# Altium PCB PCB1.PcbDoc
Units mil, origin at the board's own origin, x right, y up, seen from the top; angles counter-clockwise.
Board outline 6000 x 4000 mil, 2 copper layers (Top Layer, Bottom Layer); 64 components, 53 nets, 188 pads, 0 vias.
Unrouted connection lines stored in the file: 117.
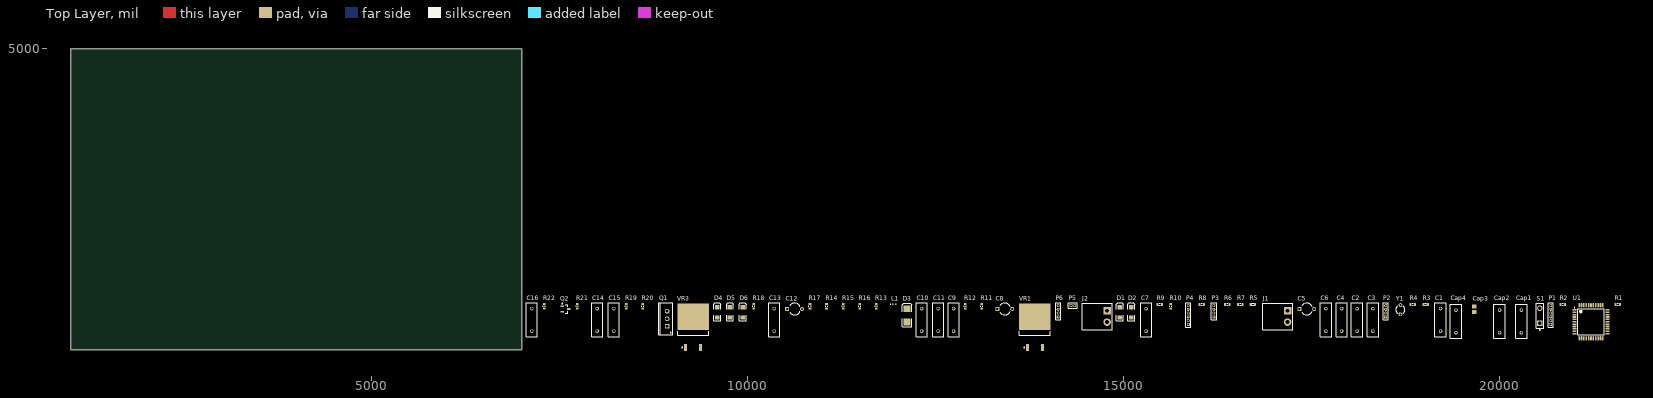
[diagram p0: Top Layer view]
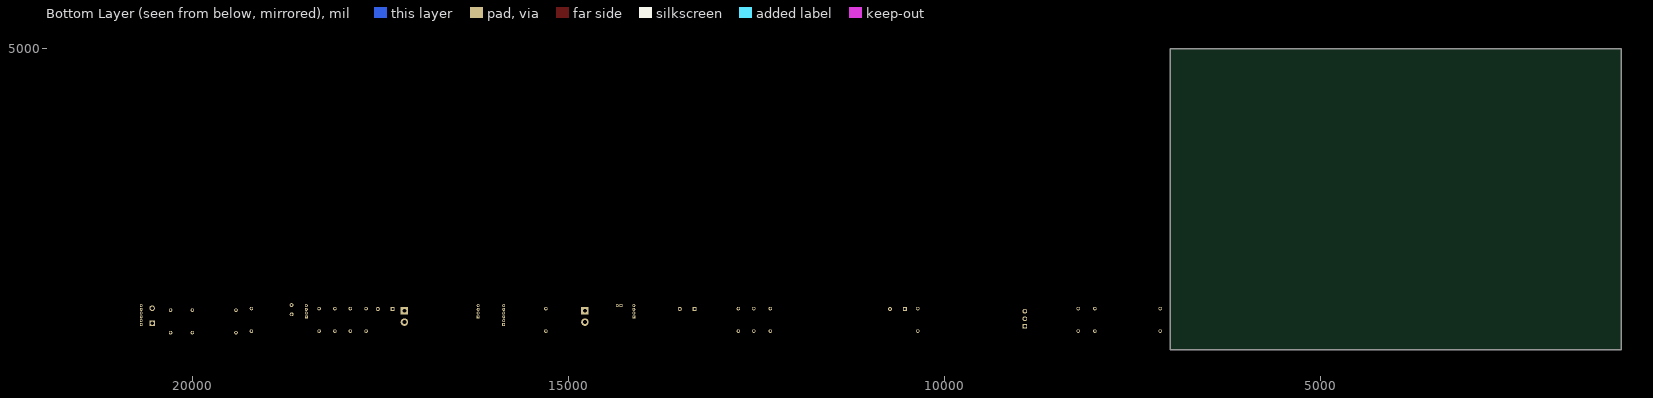
[diagram p1: Bottom Layer view, seen from below]

## Layer stack, top to bottom
Top Layer: signal copper 1.4
Dielectric: dielectric 12.6, FR-4, Dk 4.8
Bottom Layer: signal copper 1.4

## Board outline
1000,1000 7000,1000 7000,5000 1000,5000

## Design rules (kind name [scope] priority, off if disabled: settings)
Clearance [All] p1: gap=10
PolygonConnect [All] p1: connectstyle=Relief reliefconductorwidth=10 reliefentries=4 polygonreliefangle="90 Angle"
RoutingVias [All] p1: holewidth=28 width=50 viastyle="Through Hole" minholewidth=28 minwidth=50 maxholewidth=28 maxwidth=50
SilkscreenOverComponentPads [All] p1: minsilkscreentomaskgap=10
SolderMaskExpansion [All] p1: expansion=4
Width [All] p1: maxlimit=10 minlimit=10 preferedwidth=10
27 further rules are at their usual default settings.

## Components (designator, comment, footprint, x,y, rotation, side; value= is the part's Value field where it differs from the comment)
C1 "Cap" RAD-0.3 19215,1395 r90 top
C2 "Cap" RAD-0.3 18105,1395 r90 top
C3 "Cap" RAD-0.3 18315,1395 r90 top
C4 "Cap" RAD-0.3 17900,1395 r90 top
C5 "Cap2" CAPR5-4X5 17435,1540 r0 top
C6 "Cap" RAD-0.3 17690,1395 r90 top
C7 "Cap" RAD-0.3 15300,1395 r90 top
C8 "Cap2" CAPR5-4X5 13420,1540 r0 top
C9 "Cap" RAD-0.3 12740,1395 r90 top
C10 "Cap" RAD-0.3 12315,1395 r90 top
C11 "Cap" RAD-0.3 12535,1395 r90 top
C12 "Cap2" CAPR5-4X5 10625,1540 r0 top
C13 "Cap" RAD-0.3 10355,1395 r90 top
C14 "Cap" RAD-0.3 8000,1395 r90 top
C15 "Cap" RAD-0.3 8220,1395 r90 top
C16 "Cap" RAD-0.3 7130,1395 r90 top
Cap1 "0.1uF" RAD-0.3 20290,1375 r90 top
Cap2 "0.1uF" RAD-0.3 20000,1375 r90 top
Cap3 "0.1uF" 0805 19665,1535 r90 top
Cap4 "0.1uF" RAD-0.3 19420,1375 r90 top
D1 "LED2" DSO-F2/D6.1 14950,1495 r90 top
D2 "LED2" DSO-F2/D6.1 15100,1495 r90 top
D3 "D Schottky" DSO-C2/X2.3 12120,1455 r90 top
D4 "LED2" DSO-F2/D6.1 9595,1495 r90 top
D5 "LED2" DSO-F2/D6.1 9765,1495 r90 top
D6 "LED2" DSO-F2/D6.1 9935,1495 r90 top
J1 "MINICONNEC_2B" MINICONNEC_C 16845,1615 r0 top
J2 "MINICONNEC_2B" MINICONNEC_C 14445,1615 r0 top
L1 "Inductor" INDC1005AL 11950,1605 r0 top
P1 "MHDR1X6" MHDR1X6 20680,1335 r90 top
P2 "MHDR1X4" MHDR1X4 18485,1435 r90 top
P3 "MHDR1X4" MHDR1X4 16200,1435 r90 top
P4 "MHDR1X6" MHDR1X6 15860,1335 r90 top
P5 "MHDR1X2" MHDR1X2 14300,1585 r0 top
P6 "MHDR1X4" MHDR1X4 14130,1435 r90 top
Q1 "PMOS-2" SFM-T3/A4.7V 8930,1410 r90 top
Q2 "QNPN" SOT95P240-3N 7580,1540 r0 top
R1 "Res3" RESC1608L 21570,1600 r0 top
R2 "Res3" RESC1608L 20840,1600 r0 top
R3 "Res3" RESC1608L 19015,1600 r0 top
R4 "Res3" RESC1608L 18845,1600 r0 top
R5 "Res3" RESC1608L 16720,1600 r0 top
R6 "Res3" RESC1608L 16380,1600 r0 top
R7 "Res3" RESC1608L 16550,1600 r0 top
R8 "Res3" RESC1608L 16040,1600 r0 top
R9 "330" RESC1608L 15480,1600 r0 top
R10 "Res3" RESC1608L 15625,1575 r90 top
R11 "Res3" RESC1608L 13115,1575 r90 top
R12 "Res3" RESC1608L 12895,1575 r90 top
R13 "Res3" RESC1608L 11710,1575 r90 top
R14 "Res3" RESC1608L 11050,1575 r90 top
R15 "Res3" RESC1608L 11270,1575 r90 top
R16 "Res3" RESC1608L 11490,1575 r90 top
R17 "Res3" RESC1608L 10830,1575 r90 top
R18 "Res3" RESC1608L 10080,1575 r90 top
R19 "Res3" RESC1608L 8385,1575 r90 top
R20 "Res3" RESC1608L 8605,1575 r90 top
R21 "Res3" RESC1608L 7735,1575 r90 top
R22 "Res3" RESC1608L 7295,1575 r90 top
S1 "SW-PB" SPST-2 20535,1450 r90 top
U1 "PIC18F4431-E/PT" TQFP-PT44_L 21215,1370 r0 top
VR1 "LM1117T-3.3" TO254P1510-3_4N 13820,1295 r90 top
VR3 "LM1117T-5.0" TO254P1510-3_4N 9275,1295 r90 top
Y1 "XTAL 4MHz" BCY-W2/D3.1 18680,1530 r0 top

## Footprints (in the part's own frame and the unit in brackets; to place one, negate y for a bottom-side part, rotate by r counter-clockwise, add the part's x,y. Pads: shape width x height; smd on the part's side, far side on the other; paste and mask are expansions set on the pad)
0805 [mm] "Chip Resistor; Body 2.0 x 1.3 mm (LxW typ)"
  rect 1.3x1.5 smd: 1(-0.95,0) 2(0.95,0)
BCY-W2/D3.1 [mm] "Crystal, Thru-Hole; 2 Leads; Body 3.1 x 8.2 mm (Dia.xH)"
  round 1.3 hole 0.7: 1(0,1.55) 2(0,-1.55)
  silkscreen extent -1.55,-1.19 1.55,1.17
CAPR5-4X5 [mm] "Capacitor; 2 Leads"
  rect 1.35x1.35 hole 0.8: 1(-2.5,0)
  round 1.35 hole 0.8: 2(2.5,0)
  silkscreen extent -1.69,-2 1.82,2
DSO-C2/X2.3 [mm] "DO-214-AA/SMB; 2 C-Bend Leads; Body 5.3 x 3.6 mm, inc. leads (LxW)"
  rect 2.3x2.3 smd: 1(-2.25,0) 2(2.25,0)
  silkscreen extent -3.8,-1.55 4.1,1.55
DSO-F2/D6.1 [mm] "SMT LED; 2 Flat Leads"
  rect 1.5x1.5 smd: 1(-1.75,0) 2(1.75,0)
  silkscreen extent -2.9,-1.15 3.2,1.15
INDC1005AL [mm] "Chip Inductor, Body 1.0x0.5mm, IPC High Density"
  rect 0.6x0.5 smd: 1(-0.5,0) 2(0.5,0)
  silkscreen extent -1.1,-0.15 -1.1,0.15, body extent -0.55,-0.3 0.55,0.3, height 0.55
MHDR1X2 [mm] "Connector; Header; 2 Position"
  rect 1x1 hole 0.6: 1(0,0)
  round 1 hole 0.6: 2(1.27,0)
  silkscreen extent -0.9,-0.9 2.17,0.9
MHDR1X4 [mm] "Connector; Header; 4 Position"
  rect 1x1 hole 0.6: 1(0,0)
  round 1 hole 0.6: 2(1.27,0) 3(2.54,0) 4(3.81,0)
  silkscreen extent -0.9,-0.9 4.71,0.9
MHDR1X6 [mm] "Connector; Header; 6 Position"
  rect 1x1 hole 0.6: 1(0,0)
  round 1 hole 0.6: 2(1.27,0) 3(2.54,0) 4(3.81,0) 5(5.08,0) 6(6.35,0)
  silkscreen extent -0.9,-0.9 7.25,0.9
MINICONNEC_C [mil]
  rect 100x100 hole 50: 1(335,-100)
  round 100 hole 50: 2(335,-250)
  silkscreen extent 2,-350 405,2
RAD-0.3 [mm] "Radial Cap, Thru-Hole; 2 Leads; 0.3 in Pin Spacing"
  round 1.2 hole 0.7: 1(-3.81,0) 2(3.81,0)
  silkscreen extent -5.71,-1.91 5.71,1.91
RESC1608L [mm] "Chip Resistor, Body 1.6x0.8mm, IPC High Density"
  rect 0.7x0.9 smd: 1(-0.75,0) 2(0.75,0)
  silkscreen extent -0.2,-0.35 0.2,0.35, body extent -0.85,-0.48 0.85,0.48, height 0.9
SFM-T3/A4.7V [mm] "TO, Thru-Hole, Vertical, Heatsink Mounted; 3 In-Line Leads; Pitch 2.54 mm"
  rect 1.6x1.6 hole 1: 1(-2.54,0)
  round 1.6 hole 1: 2(0,0) 3(2.54,0)
  silkscreen extent -5.35,-1.85 5.35,2.85, body extent -5.4,-1.9 5.4,2.9, height 19.3
SOT95P240-3N [mm] "SOT23, 3-Leads, Body 2.9x1.3mm, Pitch 0.95mm, Lead Span 2.4mm, IPC Medium Density"
  rect 1.15x0.6 smd: 1(-1.125,0.95) 2(-1.125,-0.95) 3(1.125,0)
  silkscreen extent -1.25,-1.5 0.7,1.92, body extent -0.7,-1.5 0.7,1.5, height 1.14
SPST-2 [mm] "Circuit Breaker; 2 Leads"
  rect 1.85x1.85 hole 1.1: 1(-2.54,0)
  round 1.85 hole 1.1: 2(2.54,0)
  silkscreen extent -4.89,-1.27 4.28,1.27
TO254P1510-3_4N [mm] "D2-PAK, 4-Leads, Body 8.8x10.4mm, Pitch 2.54mm, Lead Span 15.1mm, IPC Medium Density"
  rect 2.4x1.05 smd: 1(-6.8,2.54) 3(-6.8,-2.54)
  rect 8.9x10.65 smd: 2(3.55,0)
  silkscreen extent -6.92,-5.25 -1.3,5.25, body extent -2.7,-5.28 6.3,5.28, height 4.69
TQFP-PT44_L [mm] "Thin QFP, 44-Leads, Body 10x10mm, Pitch 0.8mm, IPC High Density"
  oval 1.45x0.55 smd: 1(-5.6,4) 2(-5.6,3.2) 3(-5.6,2.4) 4(-5.6,1.6) 5(-5.6,0.8) 6(-5.6,0) 7(-5.6,-0.8) 8(-5.6,-1.6) 9(-5.6,-2.4) 10(-5.6,-3.2) 11(-5.6,-4) 23(5.6,-4) 24(5.6,-3.2) 25(5.6,-2.4) 26(5.6,-1.6) 27(5.6,-0.8) 28(5.6,0) 29(5.6,0.8) 30(5.6,1.6) 31(5.6,2.4) 32(5.6,3.2) 33(5.6,4)
  oval 0.55x1.45 smd: 12(-4,-5.6) 13(-3.2,-5.6) 14(-2.4,-5.6) 15(-1.6,-5.6) 16(-0.8,-5.6) 17(0,-5.6) 18(0.8,-5.6) 19(1.6,-5.6) 20(2.4,-5.6) 21(3.2,-5.6) 22(4,-5.6) 34(4,5.6) 35(3.2,5.6) 36(2.4,5.6) 37(1.6,5.6) 38(0.8,5.6) 39(0,5.6) 40(-0.8,5.6) 41(-1.6,5.6) 42(-2.4,5.6) 43(-3.2,5.6) 44(-4,5.6)
  silkscreen extent -5.72,-4.45 4.45,4.95, body extent -5,-5 5,5, height 1.2

## Part data
C1 C2 C3 C4 C5 C6 C7 C8 C9 C10 C11 C12 C13 C14 C15 C16: "Capacitor"
Cap1 Cap2 Cap3 Cap4: library part Cap, "Capacitor"
D1 D2 D4 D5 D6: "Typical RED, GREEN, YELLOW, AMBER GaAs LED"
D3: "Schottky Diode"
J1 J2: "Connecteur"
P1 P4: "Header, 6-Pin"
P2 P3 P6: "Header, 4-Pin"
P5: "Header, 2-Pin"
Q1: "P-Channel Power MOSFET"
Q2: "NPN Bipolar Transistor"
R1 R2 R3 R4 R5 R6 R7 R8 R10 R11 R12 R13 R14 R15 R16 R17 R18 R19 R20 R21 R22: "Resistor"
R9: library part Res3, "Resistor"
S1: "Switch"
U1: library part PIC18F4431-I/PT, "Enhanced Flash Microcontroller with nanoWatt Technology, High Performance PWM and A/D, 16K Flash, 44-Pin TQFP, Industrial Temperature"
VR1 VR3: library part "Volt Reg", "Voltage Regulator"
Y1: library part XTAL, "Crystal Oscillator"

## Nets (pads, with @x,y where several pads share a name; then routed paths per layer and width w, separated by ;. In a path a pad name is that pad's centre, name@x,y a point inside that pad or via, vN(x,y) a via of type N, cw(c..) or ccw(c..) an arc to the next point about the centre after c; other vN are vias at no path point)
"3,3 V": U1.7 U1.28
"3.3 V": R1.2
3.3V: C7.2 C11.2 Cap1.1 Cap2.2 P1.2 P3.1 P4.4 R6.2 R7.2 R14.2 VR1.3
5V: C15.2 Cap4.2 P2.1 R15.2 VR3.3
12V: C5.1 C6.2 C10.2 C12.1 C13.2 C14.2 J2.2 Q1.3 R12.2 R16.2 R18.2 VR1.1 VR3.1
GND: C1.1 C4.1 C5.2 C6.1 C7.1 C8.2 C9.1 C10.1 C11.1 C12.2 C13.1 C14.1 C15.1 C16.1 Cap1.2 Cap2.1 Cap3.1 Cap4.1 D1.2 D2.2 D4.2 D5.2 D6.2 J2.1 P1.3 P2.2 P3.2 P4.5 P4.6 P5.1 P6.1 P6.3 Q2.3 R4.2 R8.2 R13.2 R20.1 R22.1 S1.1 U1.6 U1.29 VR1.2 VR3.2
NetC1_2: C1.2 U1.31 Y1.2
NetC2_1: C2.1 J1.1
NetC2_2: C2.2
NetC3_1: C3.1
NetC3_2: C3.2 J1.2
NetC4_2: C4.2 U1.30 Y1.1
NetC8_1: C8.1 C9.2 L1.1 P5.2
NetC16_2: C16.2 R19.1
NetCap3_2: Cap3.2 R1.1 R2.1 S1.2
NetD1_1: D1.1 R9.2
NetD2_1: D2.1 R10.2
NetD3_1: D3.1 L1.2
NetD3_2: D3.2 R12.1 R17.2
NetD4_1: D4.1 R14.1
NetD5_1: D5.1 R15.1
NetD6_1: D6.1 R16.1
NetP1_1: P1.1 R2.2 U1.18
NetP1_4: P1.4 U1.17
NetP1_5: P1.5 U1.16
NetP2_3: P2.3 R3.2
NetP2_4: P2.4 R5.2
NetP3_3: P3.3 R6.1 U1.40
NetP3_4: P3.4 R7.1
NetP4_1: P4.1 U1.32
NetP4_2: P4.2 U1.44
NetP4_3: P4.3 U1.1
NetP6_2: P6.2 R11.2
NetP6_4: P6.4 Q1.2
NetQ1_1: Q1.1 Q2.1 R18.1
NetQ2_2: Q2.2 R21.1 R22.2
NetR3_1: R3.1 R4.1 U1.22
NetR5_1: R5.1 R8.1 U1.23
NetR9_1: R9.1 U1.15
NetR10_1: R10.1 U1.14
NetR11_1: R11.1 R13.1
NetR17_1: R17.1 R20.2
NetR19_2: R19.2
NetR21_2: R21.2 U1.36
NetU1_2: U1.2
NetU1_3: U1.3
NetU1_4: U1.4
NetU1_8: U1.8
NetU1_9: U1.9
NetU1_10: U1.10
NetU1_11: U1.11
NetU1_37: U1.37
NetU1_41: U1.41
pads on no net: P1.6 U1.5 U1.12 U1.13 U1.19 U1.20 U1.21 U1.24 U1.25 U1.26 U1.27 U1.33 U1.34 U1.35 U1.38 U1.39 U1.42 U1.43